# Altium PCB 宁波2号线PIS_数字功率放大器_网络音频(BHC-A-2030-02)_PCB(06001537)_V1.0.PcbDoc (part 5 of 7)
Units mm, origin at the board's own origin, x right, y up, seen from the top; angles counter-clockwise.
Board outline 86 x 96 mm, 4 copper layers (Top Layer, GND, VDD, Bottom Layer); 204 components, 185 nets, 781 pads, 267 vias.
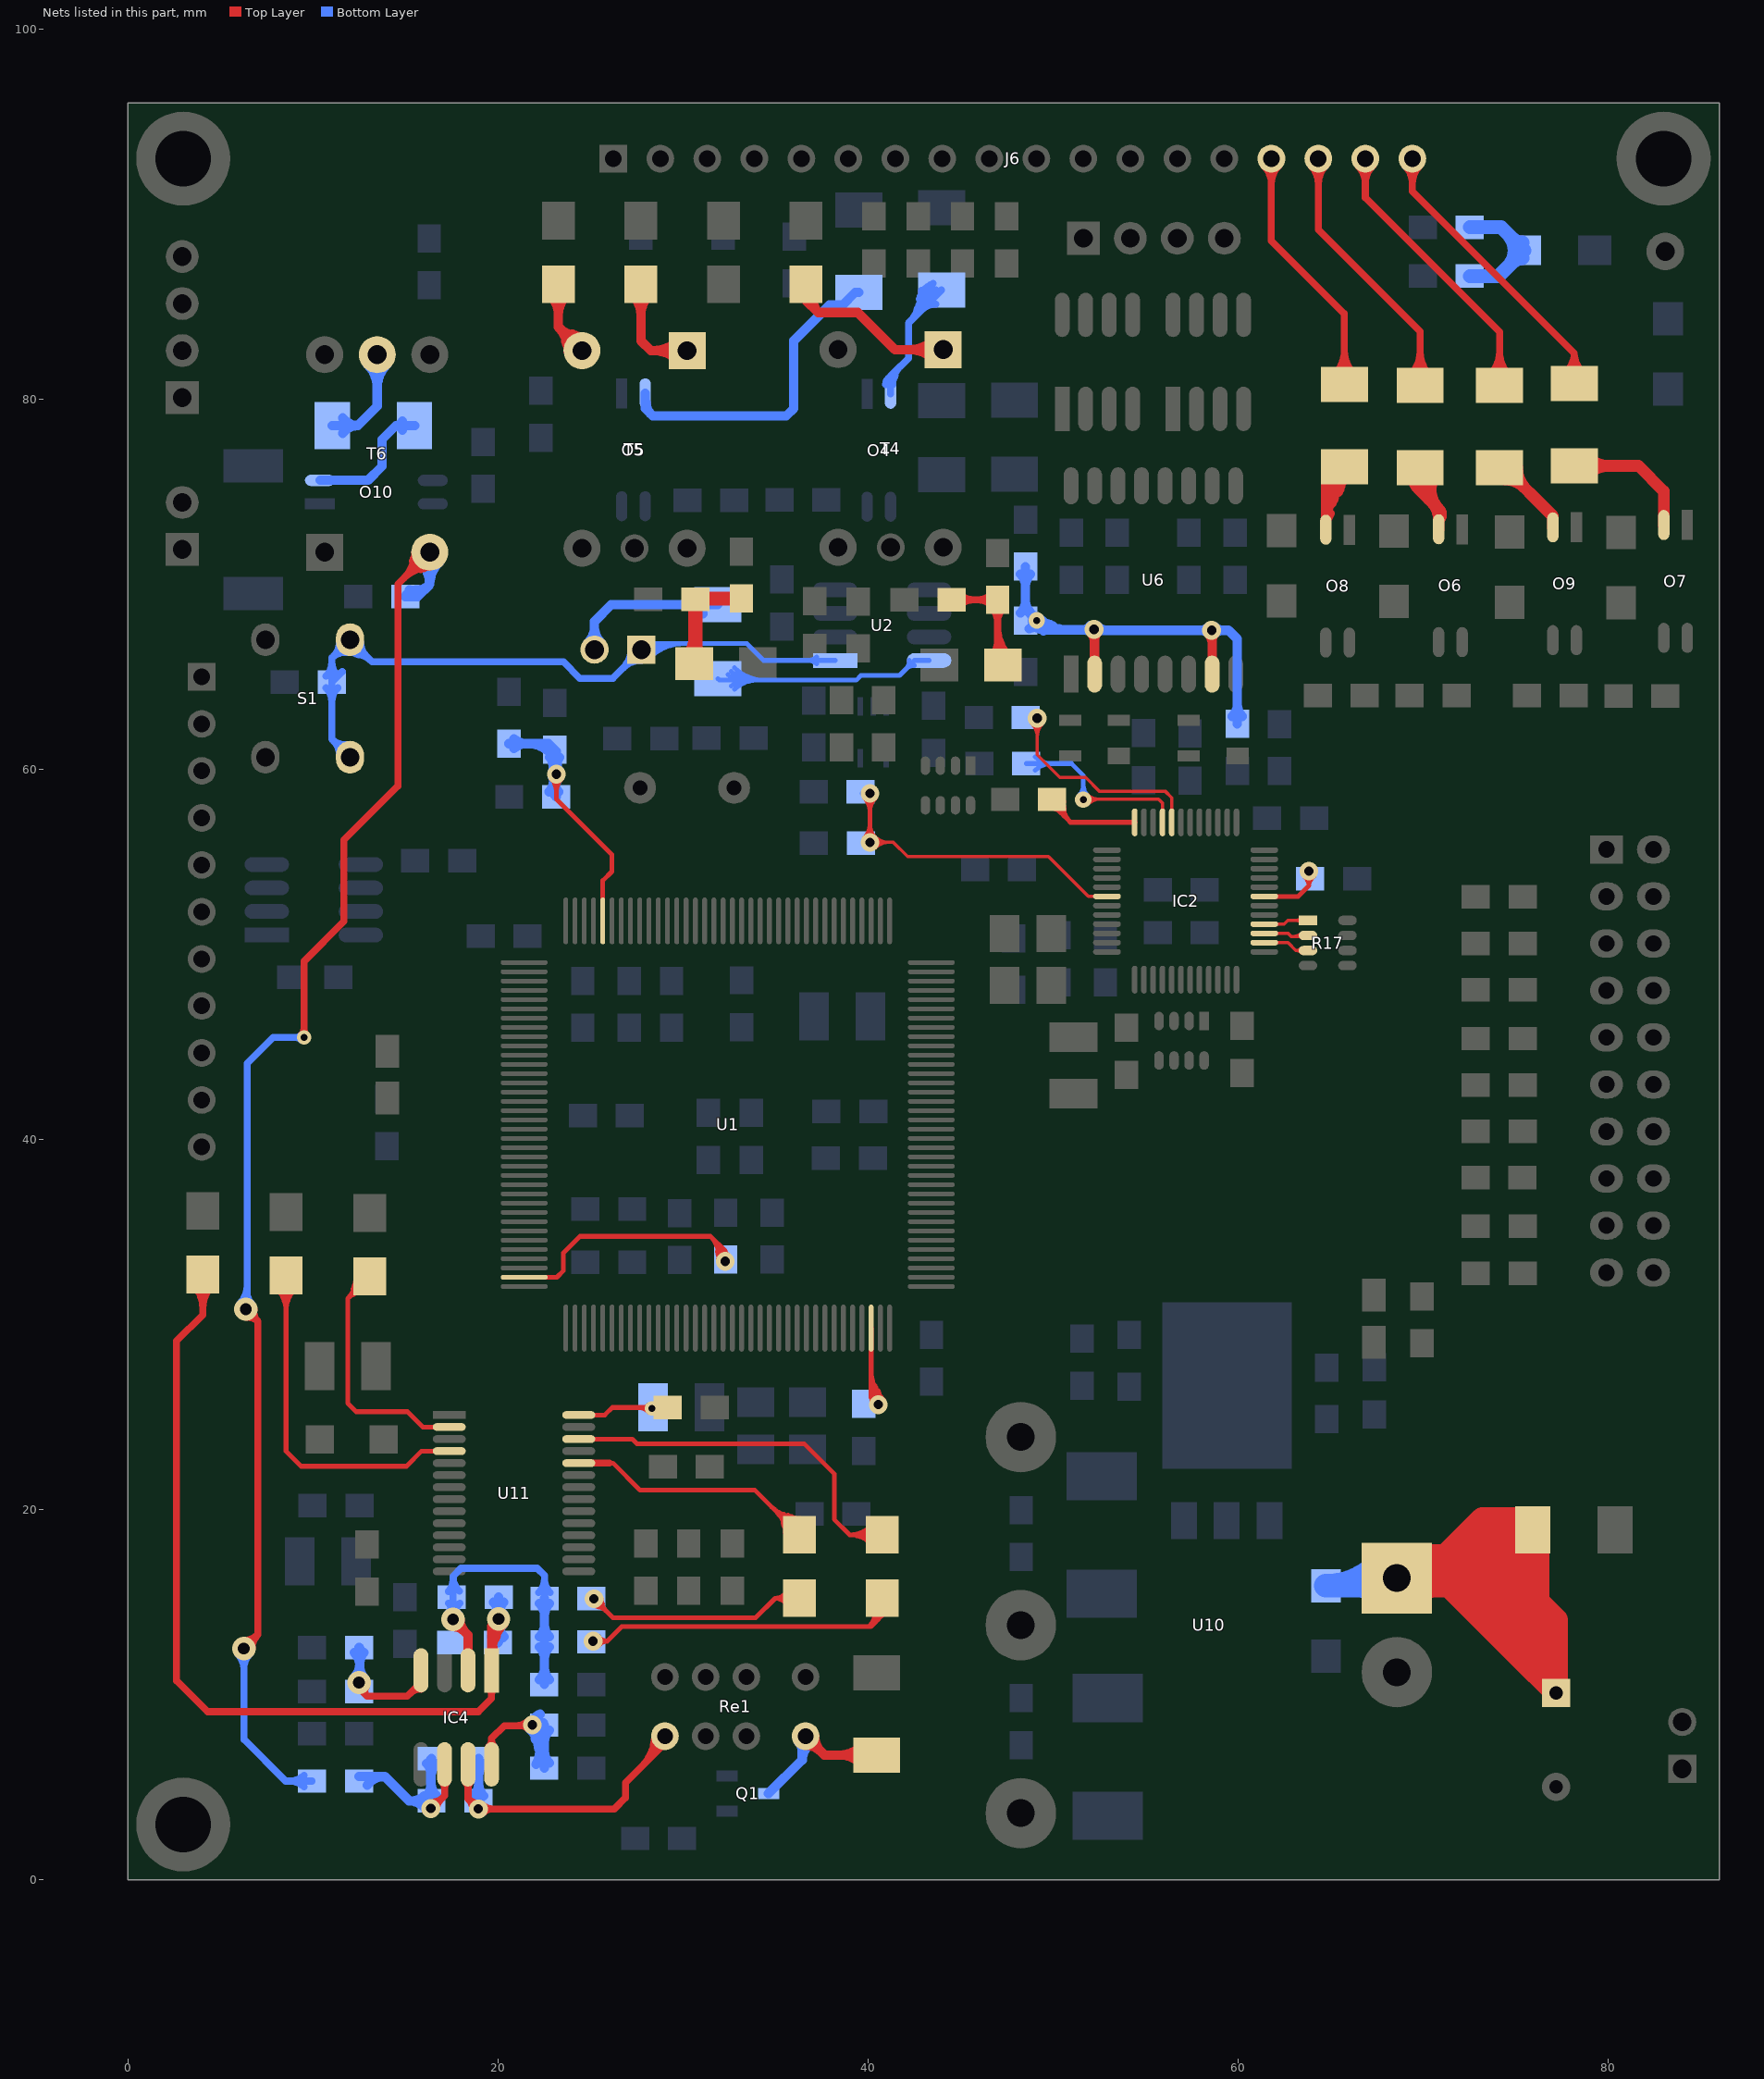
[diagram p7: the nets of this part, all layers, seen from the top]

## Via types
v1: diameter 1.016, hole 0.508, Top Layer to Bottom Layer, 122 vias
v2: diameter 0.762, hole 0.381, Top Layer to Bottom Layer, 48 vias
v3: diameter 0.889, hole 0.381, Top Layer to Bottom Layer, 37 vias
v4: diameter 1.27, hole 0.635, Top Layer to Bottom Layer, 28 vias
v5: diameter 1.27, hole 0.711, Top Layer to Bottom Layer, 20 vias
v6: diameter 0.762, hole 0.457, Top Layer to Bottom Layer, 11 vias
v7: diameter 1.143, hole 0.635, Top Layer to Bottom Layer, 1 vias

## Nets (pads, with @x,y where several pads share a name; then routed paths per layer and width w, separated by ;. In a path a pad name is that pad's centre, name@x,y a point inside that pad or via, vN(x,y) a via of type N, cw(c..) or ccw(c..) an arc to the next point about the centre after c; other vN are vias at no path point) (continued)
NetC3_2: C3.2 C10.2 R5.2 | length 23.6
  Top Layer w0.381: C3.2@44.517,69.163 46.999,69.163 R5.2@47.006,69.156 47.006,65.922 C10.2@47.29,65.638 ; 45.717,69.163 cw(c45.717,70.236) 44.958,69.477 ccw(c45.717,70.236) 45.717,69.163 ; 45.717,69.163 ccw(c45.717,68.09) 44.958,68.849 cw(c45.717,68.09) 45.717,69.163 ; 47.006,67.956 cw(c48.079,67.956) 47.32,68.715 ccw(c48.079,67.956) 47.006,67.956 ; 47.006,67.956 ccw(c45.933,67.956) 46.692,68.715 cw(c45.933,67.956) 47.006,67.956 ; 45.916,69.163 cw(c45.916,68.066) 46.692,68.842 ccw(c45.916,68.066) 45.916,69.163 ; 45.95,69.163 ccw(c45.95,70.212) 46.692,69.47 cw(c45.95,70.212) 45.95,69.163 ; C10.2@46.669,66.132 ccw(c45.854,66.947) 47.006,66.947 cw(c45.854,66.947) C10.2@46.669,66.132 ; 47.006,66.783 ccw(c48.307,66.783) 47.387,65.863 cw(c48.307,66.783) 47.006,66.783 ; 47.006,67.703 ccw(c49.227,67.703) 47.657,66.132 cw(c49.227,67.703) 47.006,67.703
NetC6_2: C6.2 T4.1 | length 19
  Top Layer w0.508: C6.2@36.317,85.955 cw(c35.928,85.339) C6.2@36.657,85.339 ; C6.2@36.657,86.619 C6.2@36.657,85.339 ; C6.2@36.764,86.018 ccw(c37.367,85.637) 36.863,85.133 ; C6.2@36.996,85.955 ccw(c37.386,85.339) C6.2@36.657,85.339 ; C6.2@37.194,85.747 ccw(c37.919,85.29) 37.313,84.684 ; T4.1@44.069,82.677 41.453,82.677 39.446,84.684 37.313,84.684 ; C6.2@36.657,85.339 37.313,84.684 ; 42.268,82.677 cw(c42.268,80.876) 43.541,82.149 ccw(c42.268,80.876) 42.268,82.677 ; 42.268,82.677 ccw(c42.268,84.478) 43.541,83.205 cw(c42.268,84.478) 42.268,82.677
NetC12_2: C12.2 T5.2 | length 17.4
  Top Layer w0.508: C12.2@22.822,85.637 cw(c21.738,84.553) 23.271,84.553 cw(c24.804,84.553) C12.2@23.72,85.637 ; C12.2@22.822,86.043 cw(c21.738,84.959) 23.271,84.959 cw(c24.804,84.959) C12.2@23.72,86.043 ; C12.2@23.271,86.619 23.271,83.901 T5.2@24.546,82.626 ; 23.661,83.144 ccw(c24.71,83.425) T5.2@24.492,82.362 ; 24.028,83.511 cw(c23.747,82.463) T5.2@24.811,82.68 ; 23.272,83.9 cw(c21.999,82.626) 23.8,82.626 ccw(c21.999,82.626) 23.272,83.9 ; 23.272,83.9 ccw(c24.546,85.173) 24.546,83.372 cw(c24.546,85.173) 23.272,83.9
NetC13_2: C13.2 C19.2 R23.2 | length 11.1
  Top Layer w0.762: C19.2@30.612,65.705 30.674,65.767 C13.2@30.674,69.188 30.718,69.232 R23.2@33.163,69.232 ; C19.2@30.253,66.064 ccw(c29.237,67.081) 30.674,67.081 cw(c29.237,67.081) C19.2@30.253,66.064 ; 30.674,66.782 ccw(c31.689,66.782) 30.971,66.064 cw(c31.689,66.782) 30.674,66.782 ; C13.2@30.981,69.009 cw(c31.52,68.47) 31.52,69.232 ccw(c31.52,68.47) C13.2@30.981,69.009
NetC14_2: C14.2 T5.1 | length 11
  Top Layer w0.508: C14.2@27.284,85.637 cw(c26.2,84.553) 27.733,84.553 cw(c29.266,84.553) C14.2@28.182,85.637 ; C14.2@27.733,86.213 27.733,83.163 28.27,82.626 T5.1@30.226,82.626 ; T5.1@29.698,82.099 ccw(c28.425,80.825) 28.425,82.626 ccw(c28.425,84.427) T5.1@29.698,83.154
NetC21_1: C21.1 JP1.1 S1.2 U2.1 | length 72.2
  Bottom Layer w0.254: JP1.1@27.762,66.472 28.092,66.802 33.452,66.802 34.366,65.888 U2.1@38.227,65.888 ; 36.768,65.888 cw(c36.768,65.229) 37.234,65.695 ccw(c36.768,65.229) 36.768,65.888 ; 36.768,65.888 ccw(c36.768,66.547) 37.234,66.081 cw(c36.768,66.547) 36.768,65.888 ; JP1.1@27.852,66.382 cw(c28.866,65.368) 28.866,66.802 ccw(c28.866,65.368) JP1.1@27.852,66.382 ; JP1.1@28.032,66.202 cw(c29.479,64.755) 29.479,66.802 ccw(c29.479,64.755) JP1.1@28.032,66.202 ; JP1.1@28.211,66.023 cw(c30.092,64.142) 30.092,66.802 ccw(c30.092,64.142) JP1.1@28.211,66.023 ; JP1.1@28.211,66.921 ccw(c28.498,67.208) 28.498,66.802 cw(c28.498,67.208) JP1.1@28.211,66.921
  Bottom Layer w0.381: C21.1@11.593,65.278 C21.1@11.033,64.718 ; S1.2@11.831,66.826 ccw(c12.727,67.08) 12.486,66.18 ; S1.2@12.014,60.655 11.033,61.637 ; JP1.1@27.762,66.472 26.213,64.922 24.435,64.922 23.546,65.811 13.208,65.811 S1.2@12.014,67.005 11.033,66.024 ; 11.033,61.637 ccw(c11.763,62.367) 11.925,61.347 cw(c11.763,62.367) 11.033,61.637 ; 11.033,61.637 C21.1@11.033,64.718 ; 11.033,63.645 cw(c12.106,63.645) 11.347,64.404 ccw(c12.106,63.645) 11.033,63.645 ; 11.033,63.645 ccw(c9.96,63.645) 10.718,64.404 cw(c9.96,63.645) 11.033,63.645 ; C21.1@11.033,64.718 11.033,66.024 ; 11.033,65.791 cw(c9.96,65.791) 10.718,65.032 ccw(c9.96,65.791) 11.033,65.791 ; 11.033,65.791 ccw(c12.106,65.791) 11.347,65.032 cw(c12.106,65.791) 11.033,65.791 ; 11.033,66.024 cw(c11.763,65.293) 11.925,66.314 ccw(c11.763,65.293) 11.033,66.024 ; 26.787,65.496 cw(c27.762,64.521) 27.762,65.9 ccw(c27.762,64.521) 26.787,65.496 ; 26.787,65.496 ccw(c25.811,66.472) 27.191,66.472 cw(c25.811,66.472) 26.787,65.496 ; 11.128,61.541 cw(c10.37,60.782) 11.443,60.782 ccw(c10.37,60.782) 11.128,61.541 ; 11.128,66.119 ccw(c10.37,66.878) 11.443,66.878 cw(c10.37,66.878) 11.128,66.119 ; S1.2@12.014,66.307 cw(c12.014,64.62) 13.207,65.813 ccw(c12.014,64.62) S1.2@12.014,66.307 ; S1.2@12.586,66.878 ccw(c13.659,66.878) 12.9,66.119 cw(c13.659,66.878) S1.2@12.586,66.878
NetC25_1: C25.1 U11.2 | length 22.2
  Top Layer w0.254: 12.18,31.941 cw(c13.217,31.678) C25.1@13.033,32.732 ; C25.1@13.076,32.608 11.887,31.419 ; U11.2@17.374,24.471 15.941,24.471 15.113,25.298 12.344,25.298 11.887,25.756 11.887,31.419 ; 11.887,31.419 cw(c12.701,30.605) 12.927,31.734 ccw(c12.701,30.605) 11.887,31.419 ; 11.887,31.419 ccw(c10.856,32.451) 12.314,32.471 cw(c10.856,32.451) 11.887,31.419 ; C25.1@12.223,31.755 cw(c12.813,31.165) 12.977,31.983 ccw(c12.813,31.165) C25.1@12.223,31.755 ; C25.1@12.313,31.845 ccw(c11.695,32.462) 12.568,32.474 cw(c11.695,32.462) C25.1@12.313,31.845
NetC28_1: C28.1 U11.4 | length 28.6
  Top Layer w0.254: C28.1@8.555,32.659 8.555,23.165 9.368,22.352 15.062,22.352 15.881,23.171 U11.4@17.374,23.171 ; 8.555,30.693 cw(c10.395,30.693) 9.094,31.993 ccw(c10.395,30.693) 8.555,30.693 ; 8.555,30.693 ccw(c6.716,30.693) 8.016,31.993 cw(c6.716,30.693) 8.555,30.693 ; 8.555,31.306 cw(c9.782,31.306) 8.914,32.173 ccw(c9.782,31.306) 8.555,31.306 ; 8.555,31.306 ccw(c7.329,31.306) 8.196,32.173 cw(c7.329,31.306) 8.555,31.306
NetC30_1: C30.1 C31.2 R48.2 U6.2 U6.7 | length 56.8
  Top Layer w0.508: v1(52.222,67.564) 52.222,67.437 52.248,67.412 U6.2@52.248,65.151 ; U6.7@58.598,65.1 U6.7@58.598,65.151 v1@58.598,67.361 ; v1@52.043,67.384 cw(c51.548,66.889) 52.248,66.889 ccw(c51.548,66.889) v1@52.043,67.384 ; 52.248,67.012 cw(c52.774,67.012) 52.402,67.384 ccw(c52.774,67.012) 52.248,67.012 ; v1@58.393,67.334 cw(c57.898,66.839) 58.598,66.839 ccw(c57.898,66.839) v1@58.393,67.334 ; 58.598,66.961 cw(c59.124,66.961) 58.752,67.334 ccw(c59.124,66.961) 58.598,66.961
  Bottom Layer w0.508: C31.2@48.515,70.951 48.515,68.655 v3(49.124,68.047) ; C30.1@48.714,67.595 cw(c49.003,67.124) 49.279,67.603 ; C30.1@48.882,68.018 ccw(c49.414,68.161) C30.1@49.139,67.684 ; C30.1@49.047,67.97 49.479,67.539 ; v3@49.173,67.863 cw(c49.455,66.812) 49.999,67.754 ; v3@49.303,67.982 ccw(c49.694,67.843) 49.486,67.483 ; v1@52.019,67.539 49.479,67.539 ; v1@52.019,67.767 v1(52.222,67.564) 52.273,67.513 v1(58.572,67.513) 59.487,67.513 59.96,67.04 R48.2@59.96,62.467 ; 48.515,69.905 cw(c49.435,69.905) 48.785,70.555 ccw(c49.435,69.905) 48.515,69.905 ; 48.515,69.905 ccw(c47.595,69.905) 48.246,70.555 cw(c47.595,69.905) 48.515,69.905 ; C30.1@48.694,68.598 ccw(c49.377,68.993) v3@49.173,68.231 ; C30.1@48.694,68.598 ccw(c49.377,68.993) v3@49.173,68.231 ; C30.1@48.694,68.598 ccw(c49.377,68.993) v3@49.173,68.231 ; C30.1@48.798,68.372 cw(c48.473,68.047) 48.933,68.047 ccw(c48.473,68.047) C30.1@48.798,68.372 ; C30.1@48.798,68.372 ccw(c49.124,68.697) 49.124,68.237 cw(c49.124,68.697) C30.1@48.798,68.372 ; 49.479,67.539 cw(c49.892,67.951) 49.313,68.023 ccw(c49.892,67.951) 49.479,67.539 ; 49.479,67.539 ccw(c49.064,67.124) 48.731,67.606 cw(c49.064,67.124) 49.479,67.539 ; 57.959,67.513 cw(c57.959,66.9) 58.393,67.334 ccw(c57.959,66.9) 57.959,67.513 ; 57.959,67.513 ccw(c57.959,68.126) 58.393,67.693 cw(c57.959,68.126) 57.959,67.513 ; 59.186,67.513 cw(c59.186,68.126) 58.752,67.693 ccw(c59.186,68.126) 59.186,67.513 ; 59.186,67.513 ccw(c59.186,66.9) 58.752,67.334 cw(c59.186,66.9) 59.186,67.513 ; 59.96,63.514 cw(c59.04,63.514) 59.691,62.863 ccw(c59.04,63.514) 59.96,63.514 ; 59.96,63.514 ccw(c60.88,63.514) 60.229,62.863 cw(c60.88,63.514) 59.96,63.514 ; C30.1@48.245,68.443 ccw(c47.591,69.096) 48.515,69.096 cw(c47.591,69.096) C30.1@48.245,68.443 ; 48.515,69.091 ccw(c49.431,69.091) 48.783,68.443 cw(c49.431,69.091) 48.515,69.091 ; C30.1@48.899,67.822 ccw(c49.584,68.507) 49.584,67.539 cw(c49.584,68.507) C30.1@48.899,67.822 ; v3@49.258,68.181 ccw(c50.81,69.733) 50.81,67.539 cw(c50.81,69.733) v3@49.258,68.181 ; 51.548,67.539 ccw(c51.548,68.239) 52.043,67.744 cw(c51.548,68.239) 51.548,67.539 ; 51.671,67.539 cw(c51.671,67.012) 52.043,67.384 ccw(c51.671,67.012) 51.671,67.539 ; v1@52.402,67.744 ccw(c52.958,68.3) 52.958,67.513 cw(c52.958,68.3) v1@52.402,67.744
NetC33_2: C33.2 R53.2 R54.2 | length 13.3
  Bottom Layer w0.762: R54.2@72.525,86.649 74.081,86.649 C33.2@75.468,88.036 74.214,89.29 R53.2@72.525,89.29 ; C33.2@74.949,88.036 cw(c73.696,88.036) 74.582,87.15 ccw(c73.696,88.036) C33.2@74.949,88.036 ; C33.2@74.949,88.036 ccw(c73.696,88.036) 74.582,88.922 cw(c73.696,88.036) C33.2@74.949,88.036 ; C33.2@74.824,87.392 cw(c75.368,86.847) 75.368,87.617 ccw(c75.368,86.847) C33.2@74.824,87.392 ; C33.2@74.824,88.681 ccw(c75.368,89.226) 75.368,88.455 cw(c75.368,89.226) C33.2@74.824,88.681
NetC36_2: C36.2 U1.106 | length 16.1
  Top Layer w0.254: U1.106@40.173,29.816 40.173,26.07 ; v1@40.203,25.802 ccw(c39.848,25.923) 40.173,26.111 ccw(c40.34,26.207) v1@40.415,26.03 ; v1@40.247,25.891 ccw(c39.812,26.181) 40.265,26.443 ; v1@40.29,25.944 ccw(c39.839,26.381) 40.376,26.705 ; 40.358,26.281 ccw(c40.792,26.531) v1@40.662,26.047 ; v1@40.473,25.768 ccw(c40.084,26.143) 40.547,26.423 ; v1(40.564,25.679) 40.173,26.07 ; 40.173,26.07 cw(c40.025,25.922) 40.216,25.836 ccw(c40.025,25.922) 40.173,26.07 ; 40.173,26.07 ccw(c40.322,26.218) 40.407,26.027 cw(c40.322,26.218) 40.173,26.07 ; 40.173,26.315 ccw(c41.2,26.315) 40.474,25.59 cw(c41.2,26.315) 40.173,26.315 ; 40.173,26.929 ccw(c41.813,26.929) 40.654,25.769 cw(c41.813,26.929) 40.173,26.929 ; 40.173,27.542 ccw(c42.426,27.542) 40.833,25.949 cw(c42.426,27.542) 40.173,27.542
NetC37_2: C37.2 U1.71 | length 22.4
  Top Layer w0.254: U1.71@21.423,32.566 23.193,32.566 23.546,32.918 23.546,33.884 24.435,34.773 31.496,34.773 ; 31.861,33.97 ccw(c32.806,34.062) v1@32.203,33.328 ; v1@31.989,33.668 ccw(c31.602,33.987) 32.101,34.035 ; 32.103,34.014 ccw(c32.825,34.085) v1@32.364,33.524 ; v1(32.283,33.426) 32.283,33.985 ; 31.496,34.773 cw(c30.454,33.731) 31.908,33.489 ccw(c30.454,33.731) 31.496,34.773 ; 31.496,34.773 32.283,33.985 ; 32.283,33.985 cw(c32.064,33.985) 32.144,33.781 ccw(c32.064,33.985) 32.283,33.985 ; 32.283,33.985 ccw(c32.503,33.985) 32.423,33.781 cw(c32.503,33.985) 32.283,33.985 ; 31.845,34.423 cw(c31.053,33.631) 32.158,33.447 ccw(c31.053,33.631) 31.845,34.423 ; 32.194,34.074 cw(c31.652,33.532) 32.409,33.406 ccw(c31.652,33.532) 32.194,34.074
NetC45_1: C45.1 C46.2 R60.2 U1.32 | length 53.8
  Top Layer w0.254: v1(23.165,59.741) 23.165,58.395 26.162,55.397 26.162,54.483 25.673,53.994 U1.32@25.673,51.816 ; 23.165,58.821 cw(c24.085,58.821) 23.434,59.471 ccw(c24.085,58.821) 23.165,58.821 ; 23.165,58.821 ccw(c22.245,58.821) 22.895,59.471 cw(c22.245,58.821) 23.165,58.821
  Bottom Layer w0.254: v1@23.156,59.741 v1(23.165,59.741)
  Bottom Layer w0.508: C45.1@20.599,61.392 22.734,61.392 R60.2@23.073,61.053 ; R60.2@22.882,60.596 cw(c22.528,59.984) v1@23.212,60.167 ; R60.2@22.896,60.589 cw(c22.657,60.13) 23.156,60.264 cw(c23.464,60.347) R60.2@23.286,60.611 ; R60.2@22.9,60.587 cw(c22.667,60.127) v1@23.183,60.127 ; R60.2@22.939,60.42 ccw(c23.67,60.616) v1@23.292,59.961 ; 22.992,60.224 cw(c22.538,60.103) v1@22.945,59.868 ; v1@22.993,59.928 ccw(c22.534,60.43) R60.2@23.214,60.43 ; v1@23.009,60.02 cw(c23.774,60.02) R60.2@23.306,60.625 ; v1@23.009,60.161 ccw(c22.307,60.161) R60.2@22.803,60.657 ; v1@23.015,59.946 ccw(c22.829,60.2) R60.2@23.102,60.357 ; C46.2@23.156,58.523 23.073,58.606 R60.2@23.073,61.053 ; v1@23.156,59.741 23.156,60.97 R60.2@23.073,61.053 ; 23.183,60.273 cw(c23.726,60.273) R60.2@23.342,60.657 ; v1@23.214,60.158 cw(c23.721,60.294) R60.2@23.345,60.66 ; 21.519,61.392 cw(c21.519,62.312) 20.869,61.661 ccw(c21.519,62.312) 21.519,61.392 ; 21.519,61.392 ccw(c21.519,60.472) 20.869,61.122 cw(c21.519,60.472) 21.519,61.392 ; R60.2@22.803,60.657 cw(c22.153,60.007) v1@23.073,60.007 ; R60.2@22.803,60.657 cw(c21.952,59.806) 23.156,59.806 ccw(c21.952,59.806) R60.2@22.803,60.657 ; R60.2@22.803,60.657 cw(c22.153,60.007) v1@23.073,60.007 ; C46.2@22.943,59.067 cw(c23.666,58.873) v1@23.292,59.521 ; C46.2@22.943,59.067 cw(c23.666,58.873) v1@23.292,59.521 ; C46.2@22.943,59.067 cw(c23.666,58.873) v1@23.292,59.521 ; v1@22.945,59.614 cw(c22.53,59.374) 22.993,59.25 ; v1@22.945,59.614 cw(c22.53,59.374) 22.993,59.25 ; v1@22.945,59.614 cw(c22.53,59.374) 22.993,59.25 ; v1@22.945,59.868 ccw(c22.474,60.14) 22.999,60.281 ; v1@22.945,59.868 ccw(c22.39,60.188) R60.2@23.009,60.354 ; v1@22.945,59.868 ccw(c22.39,60.188) R60.2@23.009,60.354 ; v1@22.945,59.868 ccw(c22.474,60.14) 22.999,60.281 ; v1@22.945,59.868 ccw(c22.39,60.188) R60.2@23.009,60.354 ; v1@22.945,59.868 ccw(c22.474,60.14) 22.999,60.281 ; R60.2@22.974,60.375 ccw(c23.633,60.552) v1@23.292,59.961 ; R60.2@22.974,60.375 ccw(c23.633,60.552) v1@23.292,59.961 ; R60.2@22.974,60.375 ccw(c23.633,60.552) v1@23.292,59.961 ; R60.2@23.019,60.316 ccw(c23.585,60.468) v1@23.292,59.961 ; R60.2@23.019,60.316 ccw(c23.585,60.468) v1@23.292,59.961 ; R60.2@23.019,60.316 ccw(c23.585,60.468) v1@23.292,59.961 ; v1@23.073,60.007 cw(c23.992,60.007) R60.2@23.342,60.657 ; v1@23.073,60.007 cw(c23.992,60.007) R60.2@23.342,60.657 ; R60.2@23.183,60.308 ccw(c23.508,60.221) v1@23.312,59.948 ; R60.2@23.183,60.308 ccw(c23.508,60.221) v1@23.312,59.948 ; R60.2@23.183,60.308 ccw(c23.508,60.221) v1@23.312,59.948 ; R60.2@23.342,60.657 ccw(c23.792,60.207) 23.156,60.207 cw(c23.792,60.207) R60.2@23.342,60.657 ; v1@23.344,59.92 cw(c24.001,60.577) 23.073,60.577 ccw(c24.001,60.577) v1@23.344,59.92 ; v1@23.344,59.92 cw(c23.8,60.376) 23.156,60.376 ccw(c23.8,60.376) v1@23.344,59.92 ; 21.642,61.392 cw(c21.642,59.75) 22.803,60.911 ccw(c21.642,59.75) 21.642,61.392 ; C46.2@22.759,58.792 ccw(c22.003,59.549) 23.073,59.549 cw(c22.003,59.549) C46.2@22.759,58.792 ; v1@22.985,59.92 ccw(c22.574,60.332) 23.156,60.332 cw(c22.574,60.332) v1@22.985,59.92 ; C46.2@23.073,58.905 cw(c24.001,58.905) 23.344,59.561 ccw(c24.001,58.905) C46.2@23.073,58.905 ; v1@23.073,59.336 ccw(c23.842,59.336) 23.298,58.792 cw(c23.842,59.336) v1@23.073,59.336
NetC54_1: C54.1 IC4.2 R70.2 R71.1 R74.2 R75.1 | length 44.3
  Top Layer w0.508: v4(17.577,14.072) 17.577,14.046 18.39,13.233 IC4.2@18.39,11.328 ; v4@17.577,13.691 cw(c17.577,12.832) 18.184,13.439 ccw(c17.577,12.832) v4@17.577,13.691 ; v4@17.958,14.072 ccw(c18.939,14.072) 18.245,13.378 cw(c18.939,14.072) v4@17.958,14.072
  Bottom Layer w0.381: v4(17.577,14.072) 17.577,16.408 ; R74.2@22.522,15.205 22.522,16.442 22.123,16.84 18.009,16.84 17.577,16.408 ; R71.1@17.577,15.145 cw(c16.504,15.145) 17.262,14.386 ccw(c16.504,15.145) R71.1@17.577,15.145 ; R71.1@17.577,15.145 ccw(c18.65,15.145) 17.891,14.386 cw(c18.65,15.145) R71.1@17.577,15.145 ; 17.577,16.408 ccw(c18.66,16.408) 17.934,15.605 cw(c18.66,16.408) 17.577,16.408 ; 22.522,16.278 cw(c21.448,16.278) 22.207,15.52 ccw(c21.448,16.278) 22.522,16.278 ; 22.522,16.278 ccw(c23.595,16.278) 22.836,15.52 cw(c23.595,16.278) 22.522,16.278 ; R71.1@17.322,14.96 cw(c16.705,14.344) 17.577,14.344 ccw(c16.705,14.344) R71.1@17.322,14.96 ; R71.1@17.322,15.589 ccw(c16.705,16.205) 17.577,16.205 cw(c16.705,16.205) R71.1@17.322,15.589 ; v4(17.577,14.072) cw(c18.825,14.07) 17.948,14.958 ccw(c18.825,14.07) v4(17.577,14.072)
  Bottom Layer w0.508: R75.1@22.522,10.559 R70.2@22.522,12.868 R74.2@22.522,15.205 ; 22.522,11.949 cw(c23.441,11.949) 22.791,12.599 ccw(c23.441,11.949) 22.522,11.949 ; 22.522,11.949 ccw(c21.602,11.949) 22.252,12.599 cw(c21.602,11.949) 22.522,11.949 ; 22.522,13.788 cw(c21.602,13.788) 22.252,13.138 ccw(c21.602,13.788) 22.522,13.788 ; 22.522,13.788 ccw(c23.441,13.788) 22.791,13.138 cw(c23.441,13.788) 22.522,13.788 ; 22.522,14.285 cw(c23.441,14.285) 22.791,14.936 ccw(c23.441,14.285) 22.522,14.285 ; 22.522,14.285 ccw(c21.602,14.285) 22.252,14.936 cw(c21.602,14.285) 22.522,14.285 ; R75.1@22.243,10.82 ccw(c21.571,11.492) 22.522,11.492 cw(c21.571,11.492) R75.1@22.243,10.82 ; 22.522,11.449 ccw(c23.411,11.449) 22.782,10.82 cw(c23.411,11.449) 22.522,11.449
NetC54_2: C54.2 C64.1 IC4.1 R71.2 | length 81
  Top Layer w0.381: C64.1@4.059,32.71 4.059,30.535 2.642,29.118 2.642,10.77 4.318,9.093 18.948,9.093 19.66,9.804 IC4.1@19.66,11.328 ; 4.059,30.897 cw(c5.746,30.897) 4.553,32.089 ccw(c5.746,30.897) 4.059,30.897 ; 4.059,30.897 ccw(c2.373,30.897) 3.565,32.089 cw(c2.373,30.897) 4.059,30.897 ; 19.66,10.023 cw(c20.165,10.023) 19.808,10.38 ccw(c20.165,10.023) 19.66,10.023 ; 19.66,10.023 ccw(c19.154,10.023) 19.511,10.38 cw(c19.154,10.023) 19.66,10.023
  Top Layer w0.508: IC4.1@19.66,11.328 19.66,13.716 v4(20.041,14.097) ; 19.739,12.555 ccw(c20.19,12.435) IC4.1@19.786,12.201 ; v4@19.756,13.843 cw(c19.227,13.371) 19.842,13.016 ; IC4.1@19.66,12.257 cw(c21.88,12.257) 20.31,13.828 ccw(c21.88,12.257) IC4.1@19.66,12.257 ; 19.66,13.484 cw(c20.654,13.484) 19.951,14.187 ccw(c20.654,13.484) 19.66,13.484
  Bottom Layer w0.508: C54.2@19.682,13.154 ccw(c19.406,13.609) v4@19.938,13.609 ; v4@19.765,13.834 cw(c19.426,13.51) 19.879,13.389 cw(c20.401,13.249) v4@20.19,13.746 ; v4@19.883,13.75 cw(c19.686,13.318) 20.144,13.441 cw(c20.462,13.526) v4@20.267,13.79 ; C54.2@19.885,13.117 ccw(c19.476,13.593) 20.104,13.593 ccw(c20.641,13.593) C54.2@20.344,13.146 ; v4@19.938,13.605 ccw(c20.656,13.605) C54.2@20.148,13.098 ; C54.2@20.006,12.828 20.049,12.871 R71.2@20.049,15.275 ; v4@19.815,13.79 cw(c19.618,13.524) C54.2@19.938,13.438 ; v4@19.815,13.79 cw(c19.618,13.524) C54.2@19.938,13.438 ; v4@19.815,13.79 cw(c19.618,13.524) C54.2@19.938,13.438 ; v4@19.852,13.766 cw(c19.589,13.302) C54.2@20.104,13.44 ; v4@19.852,13.766 cw(c19.589,13.302) C54.2@20.104,13.44 ; v4@19.852,13.766 cw(c19.589,13.302) C54.2@20.104,13.44 ; C54.2@19.938,13.438 cw(c20.406,13.313) v4@20.201,13.752 ; C54.2@19.938,13.438 cw(c20.406,13.313) v4@20.201,13.752 ; C54.2@19.938,13.438 cw(c20.406,13.313) v4@20.201,13.752 ; v4@20.049,14.355 cw(c20.969,14.355) 20.318,15.005 ccw(c20.969,14.355) v4@20.049,14.355 ; v4@20.049,14.355 ccw(c19.129,14.355) 19.779,15.005 cw(c19.129,14.355) v4@20.049,14.355 ; C54.2@20.104,13.44 cw(c20.389,13.517) v4@20.237,13.77 ; C54.2@20.104,13.44 cw(c20.389,13.517) v4@20.237,13.77 ; C54.2@20.104,13.44 cw(c20.389,13.517) v4@20.237,13.77 ; C54.2@19.737,13.098 ccw(c18.983,13.851) 20.049,13.851 cw(c18.983,13.851) C54.2@19.737,13.098 ; v4@19.771,13.828 cw(c19.101,13.157) 20.049,13.157 ccw(c19.101,13.157) v4@19.771,13.828 ; v4@19.771,14.366 ccw(c19.101,15.037) 20.049,15.037 cw(c19.101,15.037) v4@19.771,14.366 ; C54.2@20.049,13.197 cw(c20.941,13.197) 20.31,13.828 ccw(c20.941,13.197) C54.2@20.049,13.197 ; v4@20.049,13.645 ccw(c20.822,13.645) 20.275,13.098 cw(c20.822,13.645) v4@20.049,13.645 ; R71.2@20.049,14.997 ccw(c20.941,14.997) 20.31,14.366 cw(c20.941,14.997) R71.2@20.049,14.997
NetC55_1: C55.1 U11.26 | length 29
  Top Layer w0.254: U11.26@24.374,23.821 27.259,23.821 27.508,23.571 36.551,23.571 38.176,21.946 38.176,19.482 39.009,18.649 ; C55.1@40.772,18.649 39.009,18.649 ; 39.009,18.649 cw(c39.009,16.992) 40.216,18.127 ccw(c39.009,16.992) 39.009,18.649 ; 39.009,18.649 ccw(c39.009,20.306) 40.216,19.171 cw(c39.009,20.306) 39.009,18.649 ; 39.597,18.649 cw(c39.597,17.544) 40.402,18.301 ccw(c39.597,17.544) 39.597,18.649 ; 39.597,18.649 ccw(c39.597,19.753) 40.402,18.997 cw(c39.597,19.753) 39.597,18.649
NetC55_2: C55.2 R70.1 | length 26.9
  Top Layer w0.254: v1(25.146,12.903) 25.908,12.903 ; 40.081,13.716 ccw(c39.334,14.463) C55.2@40.258,14.977 ; 40.167,13.7 ccw(c39.488,14.38) C55.2@40.328,14.846 ; C55.2@40.193,14.597 cw(c39.685,14.163) 40.157,13.691 ; 40.352,13.885 ccw(c39.894,14.342) C55.2@40.386,14.763 ; 40.405,13.938 ccw(c39.794,14.55) C55.2@40.55,14.969 ; 40.546,14.079 ccw(c40.103,14.521) C55.2@40.579,14.928 ; 40.643,14.176 ccw(c40.1,14.72) C55.2@40.772,15.093 ; C55.2@40.772,15.22 40.772,14.305 40.157,13.691 ; 25.908,12.903 cw(c25.908,13.475) 25.451,13.132 ccw(c25.908,13.475) 25.908,12.903 ; 25.908,12.903 ccw(c25.908,12.332) 25.451,12.675 cw(c25.908,12.332) 25.908,12.903 ; 25.908,12.903 26.695,13.691 40.157,13.691
NetC57_2: C57.2 IC4.8 R68.1 | length 32.8
  Top Layer w0.381: IC4.8@19.66,6.248 19.66,7.645 20.345,8.331 v1@21.895,8.331 ; 19.66,7.554 cw(c19.154,7.554) 19.511,7.197 ccw(c19.154,7.554) 19.66,7.554 ; 19.66,7.554 ccw(c20.165,7.554) 19.808,7.197 cw(c20.165,7.554) 19.66,7.554 ; 20.98,8.331 ccw(c20.98,9.271) 21.645,8.607 cw(c20.98,9.271) 20.98,8.331 ; 21.226,8.331 cw(c21.226,7.738) 21.645,8.157 ccw(c21.226,7.738) 21.226,8.331
  Bottom Layer w0.508: R68.1@21.862,8.128 cw(c21.838,7.33) 22.529,7.729 ; R68.1@21.875,8.07 cw(c22.537,8.303) R68.1@22.283,8.958 ; 22.049,7.575 cw(c22.727,7.814) R68.1@22.467,8.484 ; C57.2@22.058,6.239 ccw(c20.831,6.971) 22.211,7.341 ; R68.1@22.115,8.316 ccw(c23.516,7.941) 22.26,7.215 ; R68.1@22.123,8.376 ccw(c22.788,8.359) R68.1@22.47,7.775 ; 22.223,7.081 cw(c22.916,7.326) R68.1@22.65,8.011 ; C57.2@22.513,6.044 R68.1@22.513,8.366 ; R68.1@21.81,8.135 cw(c21.54,7.02) 22.533,7.594 ; R68.1@21.81,8.135 cw(c21.54,7.02) 22.533,7.594 ; R68.1@21.81,8.135 cw(c21.54,7.02) 22.533,7.594 ; 22.513,6.964 cw(c21.593,6.964) 22.243,6.313 ccw(c21.593,6.964) 22.513,6.964 ; 22.513,6.964 ccw(c23.432,6.964) 22.782,6.313 cw(c23.432,6.964) 22.513,6.964 ; 22.513,7.446 cw(c23.433,7.446) 22.782,8.097 ccw(c23.433,7.446) 22.513,7.446 ; 22.513,7.446 ccw(c21.593,7.446) 22.243,8.097 cw(c21.593,7.446) 22.513,7.446 ; v1@21.69,8.202 cw(c19.703,6.216) 22.513,6.216 ccw(c19.703,6.216) v1@21.69,8.202 ; R68.1@22.049,8.562 cw(c20.93,7.442) 22.513,7.442 ccw(c20.93,7.442) R68.1@22.049,8.562
  other v1: 21.869,8.382
NetC59_1: C59.1 C60.2 D3.K U10.1 | length 171.1
  Top Layer w1.27: 71.044,16.307 ccw(c71.044,20.103) 73.729,17.419 ; 71.78,17.501 ccw(c71.78,20.257) 73.729,18.308 ; 72.209,17.501 cw(c72.209,15.351) 73.729,16.871 ; 72.523,17.501 ccw(c72.523,21.996) D3.K@75.702,18.817 ; 73.393,18.644 74.447,17.589 ; 73.554,17.184 cw(c71.4,18.35) 71.4,15.9 ; 73.729,15.982 cw(c71.995,14.248) 74.447,14.248 cw(c76.9,14.248) 75.166,15.982 ; 74.447,15.684 cw(c74.447,13.017) 76.334,14.903 ; 74.447,16.26 cw(c76.542,16.26) D3.K@76.008,18.286 ; 74.447,17.909 cw(c76.107,17.909) D3.K@75.684,19.514 ; 75.174,15.991 ccw(c75.996,15.188) 75.184,14.376 ; 75.463,16.707 cw(c77.812,16.707) D3.K@76.151,18.368 ; D3.K@75.611,18.627 cw(c74.359,18.76) 74.359,17.501 ; D3.K@75.702,18.368 cw(c74.501,17.167) 76.2,17.167 ; 75.844,13.183 77.191,11.836 ; 76.119,15.118 cw(c77.701,16.7) 75.463,16.7 ; U10.1@68.58,16.307 U10.1@70.002,16.307 ; U10.1@68.58,16.307 69.774,17.501 71.196,17.501 ; U10.1@68.58,16.307 68.986,15.9 71.399,15.9 ; U10.1@69.478,15.409 cw(c71.646,13.241) 71.646,16.307 ; U10.1@69.478,15.409 cw(c70.665,14.222) 70.665,15.9 ccw(c70.665,14.222) U10.1@69.478,15.409 ; U10.1@69.478,15.409 cw(c71.646,13.241) 71.646,16.307 ; U10.1@69.627,15.588 cw(c70.993,14.65) 70.993,16.307 ; U10.1@69.627,15.588 cw(c70.993,14.65) 70.993,16.307 ; U10.1@69.627,15.588 cw(c70.993,14.65) 70.993,16.307 ; U10.1@69.627,15.588 cw(c70.993,14.65) 70.993,16.307 ; U10.1@69.627,17.026 ccw(c70.993,17.964) 70.993,16.307 ; U10.1@69.627,17.026 ccw(c70.993,17.964) 70.993,16.307 ; U10.1@69.627,17.026 ccw(c70.993,17.964) 70.993,16.307 ; U10.1@69.627,17.026 ccw(c70.993,17.964) 70.993,16.307 ; U10.1@70.002,16.307 71.196,17.501 ; U10.1@70.002,16.307 70.993,16.307 ; 70.993,16.307 73.165,16.307 73.431,16.573 ; 70.993,16.307 71.399,15.9 ; 71.196,17.501 cw(c70.162,18.535) 69.315,17.342 ccw(c70.162,18.535) 71.196,17.501 ; 71.196,17.501 ccw(c71.196,16.15) 69.848,16.231 cw(c71.196,16.15) 71.196,17.501 ; 71.196,17.501 73.203,19.507 ; 71.196,17.501 74.359,17.501 ; 71.399,15.9 cw(c71.399,17.839) 69.696,16.913 ccw(c71.399,17.839) 71.399,15.9 ; 71.399,15.9 73.431,15.9 ; 71.399,15.9 73.431,13.868 ; 71.646,16.307 cw(c71.646,19.373) 69.478,17.205 ccw(c71.646,19.373) 71.646,16.307 ; 73.203,19.507 74.346,19.507 ; 73.203,19.507 73.203,18.961 75.463,16.7 ; 73.431,13.868 73.431,15.9 ; 73.431,13.868 74.447,12.852 ; 73.431,15.9 73.431,16.573 ; 73.431,16.573 74.359,17.501 ; 74.346,19.507 ccw(c75.053,20.215) 75.716,19.466 cw(c75.066,20.202) 74.371,19.507 ; 74.346,19.507 75.463,18.39 75.463,16.7 ; 74.346,19.507 74.371,19.507 ; 74.359,17.501 74.447,17.589 ; 74.371,19.507 75.33,19.507 D3.K@75.927,18.91 76.2,18.637 D3.K@76.2,17.678 ; 74.371,19.507 D3.K@76.2,17.678 ; 74.447,12.852 74.447,15.113 ; 74.447,12.852 75.184,12.116 ; 74.447,15.113 75.184,14.376 ; 74.447,15.113 74.447,16.789 ; 74.447,16.789 76.2,15.037 ; 74.447,16.789 74.447,17.589 ; 74.486,19.507 cw(c74.486,17.787) D3.K@75.702,19.003 ; 74.486,19.507 cw(c74.486,17.787) D3.K@75.702,19.003 ; 74.486,19.507 cw(c74.486,17.787) D3.K@75.702,19.003 ; 74.486,19.507 cw(c74.486,17.787) D3.K@75.702,19.003 ; 74.486,19.507 cw(c74.486,17.787) D3.K@75.702,19.003 ; 74.572,17.714 cw(c75.927,16.36) D3.K@75.927,18.275 ; 74.572,17.714 cw(c75.927,16.36) D3.K@75.927,18.275 ; 74.572,17.714 cw(c75.927,16.36) D3.K@75.927,18.275 ; 74.572,17.714 cw(c75.927,16.36) D3.K@75.927,18.275 ; 75.184,12.116 C59.1@77.191,10.109 77.191,11.836 ; 75.184,12.116 75.184,14.376 ; 75.184,14.376 77.191,12.37 ; 76.2,15.037 D3.K@76.2,17.678 ; 76.2,15.037 77.191,14.046 77.191,12.37 ; 77.191,11.836 77.191,12.37
  Bottom Layer w1.27: U10.1@68.58,16.307 68.169,15.895 C60.2@64.745,15.895 ; C60.2@64.745,15.895 ccw(c64.745,19.84) 67.646,17.167 cw(c64.745,19.84) C60.2@64.745,15.895 ; 66.507,15.895 cw(c66.507,14.234) 67.682,15.409 ccw(c66.507,14.234) 66.507,15.895
NetC61_1: C61.1 U11.24 | length 28.6
  Top Layer w0.254: 26.019,22.521 26.222,22.521 27.686,21.057 33.893,21.057 C61.1@36.301,18.649 ; 35.266,19.815 cw(c34.887,18.403) 36.301,18.776 cw(c36.471,19.974) 35.302,19.661 ; 35.402,19.289 ccw(c36.412,19.56) C61.1@36.266,18.524 ; 35.689,19.702 cw(c35.375,18.532) C61.1@36.547,18.841 ; 34.784,20.166 ccw(c36.301,21.684) 36.301,19.538 cw(c36.301,21.684) 34.784,20.166 ; 35.09,19.86 cw(c34.006,18.776) 35.539,18.776 ccw(c34.006,18.776) 35.09,19.86 ; 35.217,19.733 ccw(c36.301,20.817) 36.301,19.284 cw(c36.301,20.817) 35.217,19.733 ; C61.1@35.524,19.426 cw(c34.873,18.776) 35.793,18.776 ccw(c34.873,18.776) C61.1@35.524,19.426
  Top Layer w0.381: U11.24@24.374,22.521 26.019,22.521
NetC61_2: C61.2 R74.1 | length 19.3
  Top Layer w0.254: v1@25.072,15.164 ccw(c25.624,15.277) 25.478,14.733 ; v1(25.197,15.189) 26.213,14.173 33.934,14.173 34.981,15.22 ; v1@25.222,15.314 cw(c25.109,14.762) 25.653,14.908 ; C61.2@36.301,15.22 34.981,15.22 ; 25.847,14.539 cw(c26.498,15.189) 25.578,15.189 ccw(c26.498,15.189) 25.847,14.539 ; 25.847,14.539 ccw(c25.197,13.888) 25.197,14.808 cw(c25.197,13.888) 25.847,14.539 ; 34.981,15.22 cw(c34.981,14.457) 35.641,14.839 ccw(c34.981,14.457) 34.981,15.22 ; 34.981,15.22 ccw(c34.981,15.982) 35.641,15.601 cw(c34.981,15.982) 34.981,15.22
NetC67_2: C67.2 IC4.4 R80.1 | length 17.8
  Top Layer w0.381: v4@12.548,10.414 12.548,10.312 12.929,9.931 ; IC4.4@15.85,11.328 15.85,10.668 15.113,9.931 12.929,9.931 ; 12.929,9.931 cw(c13.213,10.216) 12.873,10.431 ccw(c13.213,10.216) 12.929,9.931 ; 15.254,10.072 cw(c15.85,9.476) 15.85,10.319 ccw(c15.85,9.476) 15.254,10.072
  Bottom Layer w0.508: R80.1@12.505,12.564 12.548,12.521 C67.2@12.548,10.414 ; v4@12.227,10.937 ccw(c11.454,11.71) 12.548,11.71 cw(c11.454,11.71) v4@12.227,10.937 ; C67.2@12.236,10.456 ccw(c11.482,11.209) 12.548,11.209 cw(c11.482,11.209) C67.2@12.236,10.456 ; R80.1@12.236,12.294 cw(c11.482,11.541) 12.548,11.541 ccw(c11.482,11.541) R80.1@12.236,12.294 ; v4@12.548,11.004 ccw(c13.322,11.004) 12.774,10.456 cw(c13.322,11.004) v4@12.548,11.004 ; 12.548,11.465 ccw(c13.294,11.465) 12.766,10.937 cw(c13.294,11.465) 12.548,11.465 ; 12.548,11.747 cw(c13.322,11.747) 12.774,12.294 ccw(c13.322,11.747) 12.548,11.747
  other v4: 12.497,10.668
NetC76_1: C76.1 C77.1 U11.28 | length 10.1
  Top Layer w0.254: U11.28@24.374,25.121 25.781,25.121 26.186,25.526 v2@28.219,25.526 ; 27.588,25.526 cw(c27.588,24.743) 28.141,25.297 ccw(c27.588,24.743) 27.588,25.526 ; 27.828,25.526 ccw(c27.828,25.97) 28.141,25.656 cw(c27.828,25.97) 27.828,25.526
  Top Layer w0.381: C76.1@29.175,25.526 v2@28.219,25.526 ; v2@28.219,25.526 cw(c28.219,24.975) 28.678,25.28 ccw(c28.219,24.975) v2@28.219,25.526 ; v2@28.219,25.526 ccw(c28.219,26.077) 28.678,25.772 cw(c28.219,26.077) v2@28.219,25.526 ; C76.1@28.456,25.341 cw(c28.901,24.897) 28.901,25.526 ccw(c28.901,24.897) C76.1@28.456,25.341
  other v2: 28.321,25.476
NetC78_1: C78.1 IC4.6 R99.1 R103.2 | length 32.1
  Top Layer w0.381: v1@16.322,3.877 cw(c16.849,3.739) 16.708,4.265 ; v1(16.383,3.861) 16.434,3.861 17.12,4.547 IC4.6@17.12,6.248 ; 17.12,4.943 cw(c17.625,4.943) 17.268,5.3 ccw(c17.625,4.943) 17.12,4.943 ; 17.12,4.943 ccw(c16.614,4.943) 16.971,5.3 cw(c16.614,4.943) 17.12,4.943 ; v1@16.383,4.178 ccw(c16.383,5.067) 17.012,4.439 cw(c16.383,5.067) v1@16.383,4.178 ; v1@16.7,3.861 cw(c17.344,3.861) 16.889,4.316 ccw(c17.344,3.861) v1@16.7,3.861
  Bottom Layer w0.508: R103.2@12.505,5.597 13.884,5.597 ; R99.1@15.755,4.13 ccw(c16.036,4.418) R99.1@16.249,4.076 ; C78.1@16.425,6.554 16.383,6.513 v1(16.383,3.861) 15.967,4.277 15.205,4.277 ; 13.884,5.597 ccw(c13.884,4.426) 12.939,5.118 cw(c13.884,4.426) 13.884,5.597 ; 13.884,5.597 15.205,4.277 ; 15.205,4.277 cw(c15.205,3.16) 16.165,3.731 ccw(c15.205,3.16) 15.205,4.277 ; 15.37,4.277 cw(c15.37,3.357) 16.02,4.007 ccw(c15.37,3.357) 15.37,4.277 ; 15.37,4.277 ccw(c15.37,5.196) 16.02,4.546 cw(c15.37,5.196) 15.37,4.277 ; R99.1@15.71,4.186 ccw(c16.11,4.879) R99.1@16.317,4.106 ; R99.1@15.71,4.186 ccw(c16.11,4.879) R99.1@16.317,4.106 ; R99.1@15.71,4.186 ccw(c16.11,4.879) R99.1@16.317,4.106 ; R99.1@16.383,4.474 cw(c15.77,4.474) 16.203,4.04 ccw(c15.77,4.474) R99.1@16.383,4.474 ; R99.1@16.383,4.474 ccw(c16.996,4.474) 16.563,4.04 cw(c16.996,4.474) R99.1@16.383,4.474 ; R99.1@16.147,4.546 ccw(c15.578,5.115) 16.383,5.115 cw(c15.578,5.115) R99.1@16.147,4.546 ; C78.1@16.155,6.285 cw(c15.605,5.735) 16.383,5.735 ccw(c15.605,5.735) C78.1@16.155,6.285 ; 16.383,5.278 ccw(c17.418,5.278) 16.686,4.546 cw(c17.418,5.278) 16.383,5.278 ; 16.383,5.534 cw(c17.445,5.534) 16.694,6.285 ccw(c17.445,5.534) 16.383,5.534
NetC78_2: C78.2 IC4.7 R99.2 Re1.5 | length 33.5
  Top Layer w0.381: IC4.7@18.39,6.248 18.39,4.394 v1(18.948,3.835) ; 27.798,6.157 ccw(c26.183,7.773) Re1.5@28.467,7.773 ; 28.449,6.808 ccw(c27.484,7.773) Re1.5@28.848,7.773 ; Re1.5@29.027,7.773 29.027,7.386 26.899,5.258 26.899,4.445 26.289,3.835 19.715,3.835 ; 18.39,4.943 cw(c18.895,4.943) 18.538,5.3 ccw(c18.895,4.943) 18.39,4.943 ; 18.39,4.943 ccw(c17.884,4.943) 18.241,5.3 cw(c17.884,4.943) 18.39,4.943 ; 18.406,4.377 cw(c17.864,3.835) 18.631,3.835 ccw(c17.864,3.835) 18.406,4.377 ; 18.406,4.377 ccw(c18.948,4.919) 18.948,4.153 cw(c18.948,4.919) 18.406,4.377 ; 19.715,3.835 cw(c19.715,4.602) 19.173,4.06 ccw(c19.715,4.602) 19.715,3.835 ; 19.715,3.835 ccw(c19.715,3.069) 19.173,3.611 cw(c19.715,3.069) 19.715,3.835
  Bottom Layer w0.508: R99.2@18.957,4.277 18.965,4.285 C78.2@18.965,6.554 ; 18.965,5.635 cw(c19.884,5.635) 19.234,6.285 ccw(c19.884,5.635) 18.965,5.635 ; 18.965,5.635 ccw(c18.045,5.635) 18.695,6.285 cw(c18.045,5.635) 18.965,5.635 ; R99.2@18.687,4.546 ccw(c18.018,5.216) 18.965,5.216 cw(c18.018,5.216) R99.2@18.687,4.546 ; R99.2@18.769,4.015 ccw(c18.296,4.488) 18.965,4.488 cw(c18.296,4.488) R99.2@18.769,4.015 ; R99.2@18.965,4.409 ccw(c19.522,4.409) 19.128,4.015 cw(c19.522,4.409) R99.2@18.965,4.409 ; 18.965,5.177 ccw(c19.857,5.177) 19.226,4.546 cw(c19.857,5.177) 18.965,5.177
NetC80_1: C80.1 R103.1 T6.2 | length 122.3
  Top Layer w0.381: v4@6.261,12.559 ccw(c6.095,13.37) 6.895,13.156 ; v4(6.274,12.497) 7.036,13.259 7.036,30.175 ; v4@6.336,12.484 cw(c7.147,12.318) 6.933,13.118 ; v4(6.375,30.836) 7.036,30.175 ; v2(9.525,45.517) 9.525,49.632 11.684,51.791 11.684,56.185 14.605,59.106 14.605,70.012 T6.2@16.323,71.73 ; 15.22,70.635 cw(c16.624,70.259) T6.2@16.332,71.683 ; 15.228,70.627 ccw(c14.852,72.031) T6.2@16.276,71.739 ; 15.38,71.231 cw(c16.485,70.935) T6.2@16.256,72.056 ; 15.824,70.787 ccw(c15.528,71.892) T6.2@16.649,71.663 ; 7.033,13.256 cw(c6.274,14.014) 6.274,12.941 ccw(c6.274,14.014) 7.033,13.256 ; 7.033,13.256 ccw(c7.791,12.497) 6.718,12.497 cw(c7.791,12.497) 7.033,13.256 ; 7.036,30.175 cw(c7.572,30.712) 6.818,30.79 ccw(c7.572,30.712) 7.036,30.175 ; 7.036,30.175 ccw(c6.499,29.639) 6.421,30.393 cw(c6.499,29.639) 7.036,30.175 ; 9.525,45.977 cw(c9.065,45.977) 9.39,45.652 ccw(c9.065,45.977) 9.525,45.977 ; 9.525,45.977 ccw(c9.985,45.977) 9.66,45.652 cw(c9.985,45.977) 9.525,45.977 ; 14.941,70.348 cw(c16.323,68.966) 16.323,70.92 ccw(c16.323,68.966) 14.941,70.348 ; 14.941,70.348 ccw(c13.559,71.73) 15.513,71.73 cw(c13.559,71.73) 14.941,70.348 ; 15.591,70.998 cw(c16.323,70.267) 16.323,71.301 ccw(c16.323,70.267) 15.591,70.998 ; 15.591,70.998 ccw(c14.86,71.73) 15.894,71.73 cw(c14.86,71.73) 15.591,70.998
  Bottom Layer w0.381: v4(6.274,12.497) 6.274,7.595 8.525,5.343 R103.1@9.965,5.343 ; v4(6.375,30.836) 6.452,30.912 6.452,44.12 7.849,45.517 v2(9.525,45.517) ; 6.274,11.424 cw(c7.347,11.424) 6.588,12.182 ccw(c7.347,11.424) 6.274,11.424 ; 6.274,11.424 ccw(c5.201,11.424) 5.959,12.182 cw(c5.201,11.424) 6.274,11.424 ; 8.765,5.343 cw(c8.765,4.27) 9.524,5.029 ccw(c8.765,4.27) 8.765,5.343 ; 8.765,5.343 ccw(c8.765,6.417) 9.524,5.658 cw(c8.765,6.417) 8.765,5.343 ; 9.065,45.517 cw(c9.065,45.057) 9.39,45.382 ccw(c9.065,45.057) 9.065,45.517 ; 9.065,45.517 ccw(c9.065,45.977) 9.39,45.652 cw(c9.065,45.977) 9.065,45.517 ; v4@6.061,31.15 ccw(c5.118,32.093) 6.452,32.093 cw(c5.118,32.093) v4@6.061,31.15 ; 6.452,31.725 ccw(c7.265,31.725) 6.69,31.15 cw(c7.265,31.725) 6.452,31.725
  Bottom Layer w0.508: C80.1@14.995,69.341 15.671,69.341 16.323,69.993 ; C80.1@15.034,69.432 cw(c15.696,68.751) C80.1@15.709,69.7 ; T6.2@16.323,71.73 16.323,69.993 ; 16.323,69.993 cw(c15.531,70.784) 15.226,69.707 ccw(c15.531,70.784) 16.323,69.993 ; 16.323,69.993 cw(c17.971,69.993) 16.836,71.189 ccw(c17.971,69.993) 16.323,69.993 ; 16.323,69.993 ccw(c14.674,69.993) 15.809,71.189 cw(c14.674,69.993) 16.323,69.993
NetD1_A: D1.A O4.2 | length 21.1
  Bottom Layer w0.381: O4.2@41.167,80.896 ccw(c40.841,81.462) 41.471,81.293 ; O4.2@41.224,80.289 41.224,81.255 42.189,82.22 42.189,84.106 ; 42.613,84.699 cw(c44.287,84.291) D1.A@43.662,85.897 ; D1.A@42.786,85.409 cw(c43.963,85.122) D1.A@43.524,86.252 ; D1.A@43.98,85.897 42.189,84.106 ; 42.19,84.106 ccw(c40.471,85.824) 42.901,85.879 cw(c40.471,85.824) 42.19,84.106 ; O4.2@40.957,80.797 cw(c41.417,80.797) 41.092,81.123 ccw(c41.417,80.797) O4.2@40.957,80.797 ; O4.2@41.338,80.797 cw(c42.718,80.797) 41.743,81.773 ccw(c42.718,80.797) O4.2@41.338,80.797 ; 42.82,84.736 ccw(c41.704,85.852) 43.282,85.888 cw(c41.704,85.852) 42.82,84.736 ; 42.904,84.82 cw(c43.662,84.061) 43.662,85.135 ccw(c43.662,84.061) 42.904,84.82
NetD2_A: D2.A O5.2 | length 18.1
  Bottom Layer w0.508: O5.2@27.965,80.315 27.965,79.502 28.372,79.096 35.585,79.096 35.992,79.502 35.992,83.16 37.922,85.09 38.633,85.09 39.313,85.77 D2.A@39.51,85.77 ; O5.2@28.016,79.807 ccw(c28.875,79.807) 28.268,79.2
NetD4_A: D4.A Q1.3 Re1.8 | length 14.2
  Top Layer w0.508: Re1.8@36.627,7.277 cw(c36.627,6.079) 37.474,6.926 cw(c38.32,7.773) Re1.8@37.123,7.773 ; Re1.8@36.627,7.773 37.649,6.75 D4.A@40.475,6.75 ; D4.A@39.664,6.256 ccw(c38.471,5.064) 38.471,6.75 ccw(c38.471,8.436) D4.A@39.664,7.244
  Bottom Layer w0.508: Q1.3@34.628,4.674 36.449,6.495 36.449,7.595 Re1.8@36.627,7.773 ; Re1.8@36.276,7.422 cw(c35.859,7.005) 36.449,7.005 ; 36.449,6.483 cw(c37.525,6.483) Re1.8@36.91,7.366
NetD7_A: D7.A JP1.2 | length 17.7
  Bottom Layer w0.508: JP1.2@25.222,66.472 25.222,67.996 26.13,68.904 D7.A@31.89,68.904 ; 25.222,67.698 cw(c23.996,67.698) 24.863,66.831 ccw(c23.996,67.698) 25.222,67.698 ; 25.222,67.698 ccw(c26.449,67.698) 25.581,66.831 cw(c26.449,67.698) 25.222,67.698 ; 29.886,68.904 cw(c29.886,67.217) 31.078,68.41 ccw(c29.886,67.217) 29.886,68.904 ; 29.886,68.904 ccw(c29.886,70.59) 31.078,69.398 cw(c29.886,70.59) 29.886,68.904
NetD7_K: D7.K U2.8 | length 26.2
  Bottom Layer w0.254: D7.K@31.89,64.904 31.973,64.821 39.369,64.821 39.623,65.075 41.707,65.075 42.52,65.888 U2.8@43.307,65.888 ; D7.K@32.432,65.128 ccw(c33.174,65.87) 33.174,64.821 cw(c33.174,65.87) D7.K@32.432,65.128 ; D7.K@32.611,64.499 cw(c33.387,63.724) 33.387,64.821 ccw(c33.387,63.724) D7.K@32.611,64.499 ; D7.K@32.611,65.308 ccw(c33.787,66.483) 33.787,64.821 cw(c33.787,66.483) D7.K@32.611,65.308 ; D7.K@32.791,64.32 cw(c34,63.111) 34,64.821 ccw(c34,63.111) D7.K@32.791,64.32 ; D7.K@32.791,65.487 ccw(c34.4,67.096) 34.4,64.821 cw(c34.4,67.096) D7.K@32.791,65.487 ; 42.032,65.4 ccw(c41.544,65.888) 42.234,65.888 cw(c41.544,65.888) 42.032,65.4 ; 42.062,65.43 cw(c42.507,64.986) 42.507,65.615 ccw(c42.507,64.986) 42.062,65.43
NetD14_A: D14.A O6.2 | length 21.6
  Top Layer w0.635: D14.A@69.837,76.295 69.837,75.07 ; O6.2@70.841,72.974 70.841,74.066 ; 69.837,75.07 cw(c70.703,75.07) 70.204,75.777 ccw(c70.703,75.07) 69.837,75.07 ; 69.837,75.07 ccw(c68.972,75.07) 69.471,75.777 cw(c68.972,75.07) 69.837,75.07 ; 69.837,75.07 70.841,74.066 ; 70.841,74.066 cw(c70.539,73.765) 70.85,73.474 ccw(c70.539,73.765) 70.841,74.066 ; 70.841,74.066 cw(c71.872,75.098) 70.676,75.932 ccw(c71.872,75.098) 70.841,74.066 ; D14.A@69.634,76.659 ccw(c70.609,75.979) 69.768,75.139 cw(c70.609,75.979) D14.A@69.634,76.659 ; D14.A@70.155,76.295 ccw(c71.24,75.538) 70.304,74.603 cw(c71.24,75.538) D14.A@70.155,76.295 ; 70.449,74.458 cw(c69.474,73.482) 70.853,73.482 ccw(c69.474,73.482) 70.449,74.458
NetD14_K: D14.K J6.16 | length 19.5
  Top Layer w0.381: J6.16@63.944,92.604 cw(c62.989,91.649) 64.34,91.649 cw(c65.691,91.649) J6.16@64.736,92.604 ; J6.16@64.34,93 64.34,89.152 69.837,83.655 D14.K@69.837,80.74 ; D14.K@69.299,81.279 ccw(c67.998,82.58) 69.837,82.58 ccw(c71.677,82.58) D14.K@70.376,81.279
NetD15_A: D15.A O7.2 | length 12
  Top Layer w0.635: D15.A@78.169,76.397 81.642,76.397 83.007,75.032 O7.2@83.007,73.203 ; 80.019,76.397 cw(c80.019,77.93) 78.935,76.846 ccw(c80.019,77.93) 80.019,76.397 ; 80.019,76.397 ccw(c80.019,74.864) 78.935,75.948 cw(c80.019,74.864) 80.019,76.397
NetD15_K: D15.K J6.18 | length 20.3
  Top Layer w0.381: J6.18@69.024,92.604 cw(c68.069,91.649) 69.42,91.649 cw(c70.771,91.649) J6.18@69.816,92.604 ; J6.18@69.42,93 69.42,91.235 78.169,82.486 ; D15.K@77.676,81.423 ccw(c76.775,82.486) 78.169,82.486 ; D15.K@78.169,80.842 78.169,82.486 ; D15.K@78.661,81.423 cw(c79.562,82.486) 78.169,82.486
NetD16_A: D16.A O8.2 | length 22.6
  Top Layer w0.508: O8.2@64.745,72.949 64.745,75.419 D16.A@65.748,76.422 ; D16.A@64.856,75.948 cw(c64.163,75.469) 64.893,75.047 ; D16.A@64.915,75.875 cw(c63.977,75.019) 65.077,74.384 ; 64.969,75.178 cw(c65.885,74.649) D16.A@65.611,75.671 ; D16.A@65.29,76.218 cw(c64.515,75.51) 65.424,74.985 ; O8.2@64.719,73.501 ccw(c64.458,73.954) 64.963,73.818 cw(c64.458,73.954) O8.2@64.719,73.501 ; O8.2@64.745,73.004 cw(c68.773,73.004) 65.924,75.852 ccw(c68.773,73.004) O8.2@64.745,73.004 ; 64.745,74.23 cw(c67.546,74.23) 65.565,76.211 ccw(c67.546,74.23) 64.745,74.23 ; D16.A@64.745,75.457 cw(c66.32,75.457) 65.206,76.571 ccw(c66.32,75.457) D16.A@64.745,75.457
NetD16_K: D16.K J6.15 | length 18.9
  Top Layer w0.381: J6.15@61.404,92.604 cw(c60.449,91.649) 61.8,91.649 cw(c63.151,91.649) J6.15@62.196,92.604 ; J6.15@61.8,93 61.8,88.568 65.748,84.62 D16.K@65.748,80.791 ; D16.K@65.209,81.33 ccw(c63.908,82.631) 65.748,82.631 ccw(c67.588,82.631) D16.K@66.287,81.33
NetD17_A: D17.A O9.2 | length 9.4
  Top Layer w0.635: D17.A@74.13,76.295 74.403,76.295 77.013,73.685 O9.2@77.013,73.076 ; D17.A@74.448,75.66 cw(c74.448,74.235) 75.455,75.243 ccw(c74.448,74.235) D17.A@74.448,75.66 ; D17.A@75.083,76.295 ccw(c76.723,76.295) 75.563,75.135 cw(c76.723,76.295) D17.A@75.083,76.295
NetD17_K: D17.K J6.17 | length 20.3
  Top Layer w0.381: J6.17@66.484,92.604 cw(c65.529,91.649) 66.88,91.649 cw(c68.231,91.649) J6.17@67.276,92.604 ; J6.17@66.88,93 66.88,90.879 74.13,83.629 D17.K@74.13,80.74 ; D17.K@73.591,81.279 ccw(c72.29,82.58) 74.13,82.58 ccw(c75.97,82.58) D17.K@74.669,81.279
NetD19_A: D19.A O10.2 | length 9
  Bottom Layer w0.508: O10.2@10.389,75.616 12.979,75.616 13.741,76.378 13.741,77.826 14.491,78.575 ; D19.A@15.5,78.575 14.491,78.575 ; 14.491,78.575 cw(c14.491,78.194) 14.847,78.328 ccw(c14.491,78.194) 14.491,78.575 ; 14.491,78.575 ccw(c14.491,78.955) 14.847,78.821 cw(c14.491,78.955) 14.491,78.575
NetD19_K: D19.K T6.4 | length 15.1
  Bottom Layer w0.508: D19.K@11.055,78.575 12.433,78.575 ; T6.4@13.483,82.41 13.483,79.624 12.433,78.575 ; 12.433,78.575 cw(c12.433,79.584) 11.619,78.988 ccw(c12.433,79.584) 12.433,78.575 ; 12.433,78.575 ccw(c12.433,77.565) 11.619,78.162 cw(c12.433,77.565) 12.433,78.575 ; 13.483,80.609 cw(c15.284,80.609) 14.01,81.882 ccw(c15.284,80.609) 13.483,80.609 ; 13.483,80.609 ccw(c11.682,80.609) 12.955,81.882 cw(c11.682,80.609) 13.483,80.609
NetIC2_2: IC2.2 R17.3 | length 3.8
  Top Layer w0.178: IC2.2@61.417,50.64 62.7,50.64 63.124,50.216 R17.3@63.779,50.216 ; 63.135,50.216 cw(c63.135,49.817) 63.417,50.099 ccw(c63.135,49.817) 63.135,50.216 ; 63.135,50.216 ccw(c63.135,50.614) 63.417,50.333 cw(c63.135,50.614) 63.135,50.216
NetIC2_3: IC2.3 R17.2 | length 3.7
  Top Layer w0.178: IC2.3@61.417,51.14 62.703,51.14 62.865,50.978 63.729,50.978 R17.2@63.779,51.029 ; 63.012,50.978 ccw(c63.012,51.55) 63.417,51.145 cw(c63.012,51.55) 63.012,50.978 ; 63.257,50.978 cw(c63.257,50.753) 63.417,50.912 ccw(c63.257,50.753) 63.257,50.978
NetIC2_4: IC2.4 R17.1 | length 3.7
  Top Layer w0.178: IC2.4@61.417,51.64 62.485,51.64 62.687,51.841 R17.1@63.779,51.841 ; 63.135,51.841 cw(c63.135,51.443) 63.417,51.725 ccw(c63.135,51.443) 63.135,51.841 ; 63.135,51.841 ccw(c63.135,52.24) 63.417,51.958 cw(c63.135,52.24) 63.135,51.841
NetIC2_7: IC2.7 R21.1 | length 6.1
  Top Layer w0.254: IC2.7@61.417,53.14 63.249,53.14 63.83,53.721 ; v1(63.83,54.508) 63.83,53.721 ; 63.83,53.721 cw(c64.453,53.721) 64.067,54.21 ccw(c64.453,53.721) 63.83,53.721 ; 63.83,53.721 ccw(c63.207,53.721) 63.594,54.21 cw(c63.207,53.721) 63.83,53.721
  Bottom Layer w0.254: R21.1@63.83,54.145 v1(63.83,54.508)
NetIC2_20: IC2.20 R34.1 | length 16.5
  Top Layer w0.178: v1(49.149,62.763) 49.149,60.782 50.368,59.563 51.765,59.563 52.502,58.826 56.058,58.826 56.417,58.467 IC2.20@56.417,57.14 ; 49.149,61.752 cw(c50.161,61.752) 49.445,62.467 ccw(c50.161,61.752) 49.149,61.752 ; 49.149,61.752 ccw(c48.137,61.752) 48.853,62.467 cw(c48.137,61.752) 49.149,61.752 ; 49.149,62.181 cw(c49.732,62.181) 49.32,62.593 ccw(c49.732,62.181) 49.149,62.181 ; 49.149,62.181 ccw(c48.566,62.181) 48.978,62.593 cw(c48.566,62.181) 49.149,62.181
NetIC2_21: IC2.21 R36.1 | length 19.8
  Top Layer w0.178: v3(51.638,58.369) 51.664,58.395 55.702,58.395 55.917,58.18 IC2.21@55.917,57.14 ; v3@51.764,58.243 cw(c52.129,57.879) 52.129,58.395 ccw(c52.129,57.879) v3@51.764,58.243 ; v3@51.89,58.118 cw(c52.558,57.449) 52.558,58.395 ccw(c52.558,57.449) v3@51.89,58.118 ; v3@51.89,58.621 ccw(c52.435,59.166) 52.435,58.395 cw(c52.435,59.166) v3@51.89,58.621
  Bottom Layer w0.254: R36.1@48.557,60.316 50.994,60.316 51.638,59.671 v3(51.638,58.369) ; 49.91,60.316 cw(c49.91,61.542) 49.043,60.675 ccw(c49.91,61.542) 49.91,60.316 ; 49.91,60.316 ccw(c49.91,59.089) 49.043,59.956 cw(c49.91,59.089) 49.91,60.316 ; 51.638,59.136 cw(c50.872,59.136) 51.414,58.594 ccw(c50.872,59.136) 51.638,59.136 ; 51.638,59.136 ccw(c52.405,59.136) 51.863,58.594 cw(c52.405,59.136) 51.638,59.136
NetIC2_24: IC2.24 R35.1 | length 10.5
  Top Layer w0.254: R35.1@50.004,58.074 50.939,57.14 ; R35.1@50.245,58.572 cw(c49.558,57.763) R35.1@50.616,57.849 ; IC2.24@54.417,57.14 50.939,57.14 ; 50.939,57.14 cw(c51.854,58.055) 50.58,58.287 ccw(c51.854,58.055) 50.939,57.14 ; R35.1@50.081,57.871 cw(c50.081,57.564) 50.297,57.781 ccw(c50.081,57.564) R35.1@50.081,57.871 ; R35.1@50.33,58.333 ccw(c51.275,58.161) 50.596,57.482 cw(c51.275,58.161) R35.1@50.33,58.333
NetIC2_30: IC2.30 R18.2 R22.1 | length 27.9
  Top Layer w0.178: v1(40.107,56.058) 41.377,56.058 42.139,55.296 49.754,55.296 51.91,53.14 IC2.30@52.917,53.14 ; 40.689,56.058 cw(c40.689,56.64) 40.277,56.228 ccw(c40.689,56.64) 40.689,56.058 ; 40.689,56.058 ccw(c40.689,55.475) 40.277,55.887 cw(c40.689,55.475) 40.689,56.058 ; 41.118,56.058 cw(c41.118,57.07) 40.403,56.354 ccw(c41.118,57.07) 41.118,56.058 ; 41.118,56.058 ccw(c41.118,55.046) 40.403,55.761 cw(c41.118,55.046) 41.118,56.058
  Top Layer w0.254: v1(40.107,56.058) v1(40.107,58.699) ; 40.107,56.978 cw(c39.187,56.978) 39.837,56.327 ccw(c39.187,56.978) 40.107,56.978 ; 40.107,56.978 ccw(c41.026,56.978) 40.376,56.327 cw(c41.026,56.978) 40.107,56.978 ; 40.107,57.78 cw(c41.026,57.78) 40.376,58.43 ccw(c41.026,57.78) 40.107,57.78 ; 40.107,57.78 ccw(c39.187,57.78) 39.837,58.43 cw(c39.187,57.78) 40.107,57.78
  Bottom Layer w0.254: R18.2@39.699,58.699 v1(40.107,58.699)